# Altium PCB PCB1.PcbDoc
Units mil, origin at the board's own origin, x right, y up, seen from the top; angles counter-clockwise.
Board outline 1811.02 x 1811.02 mil, 2 copper layers (Top Layer, Bottom Layer); 89 components, 61 nets, 272 pads, 73 vias.
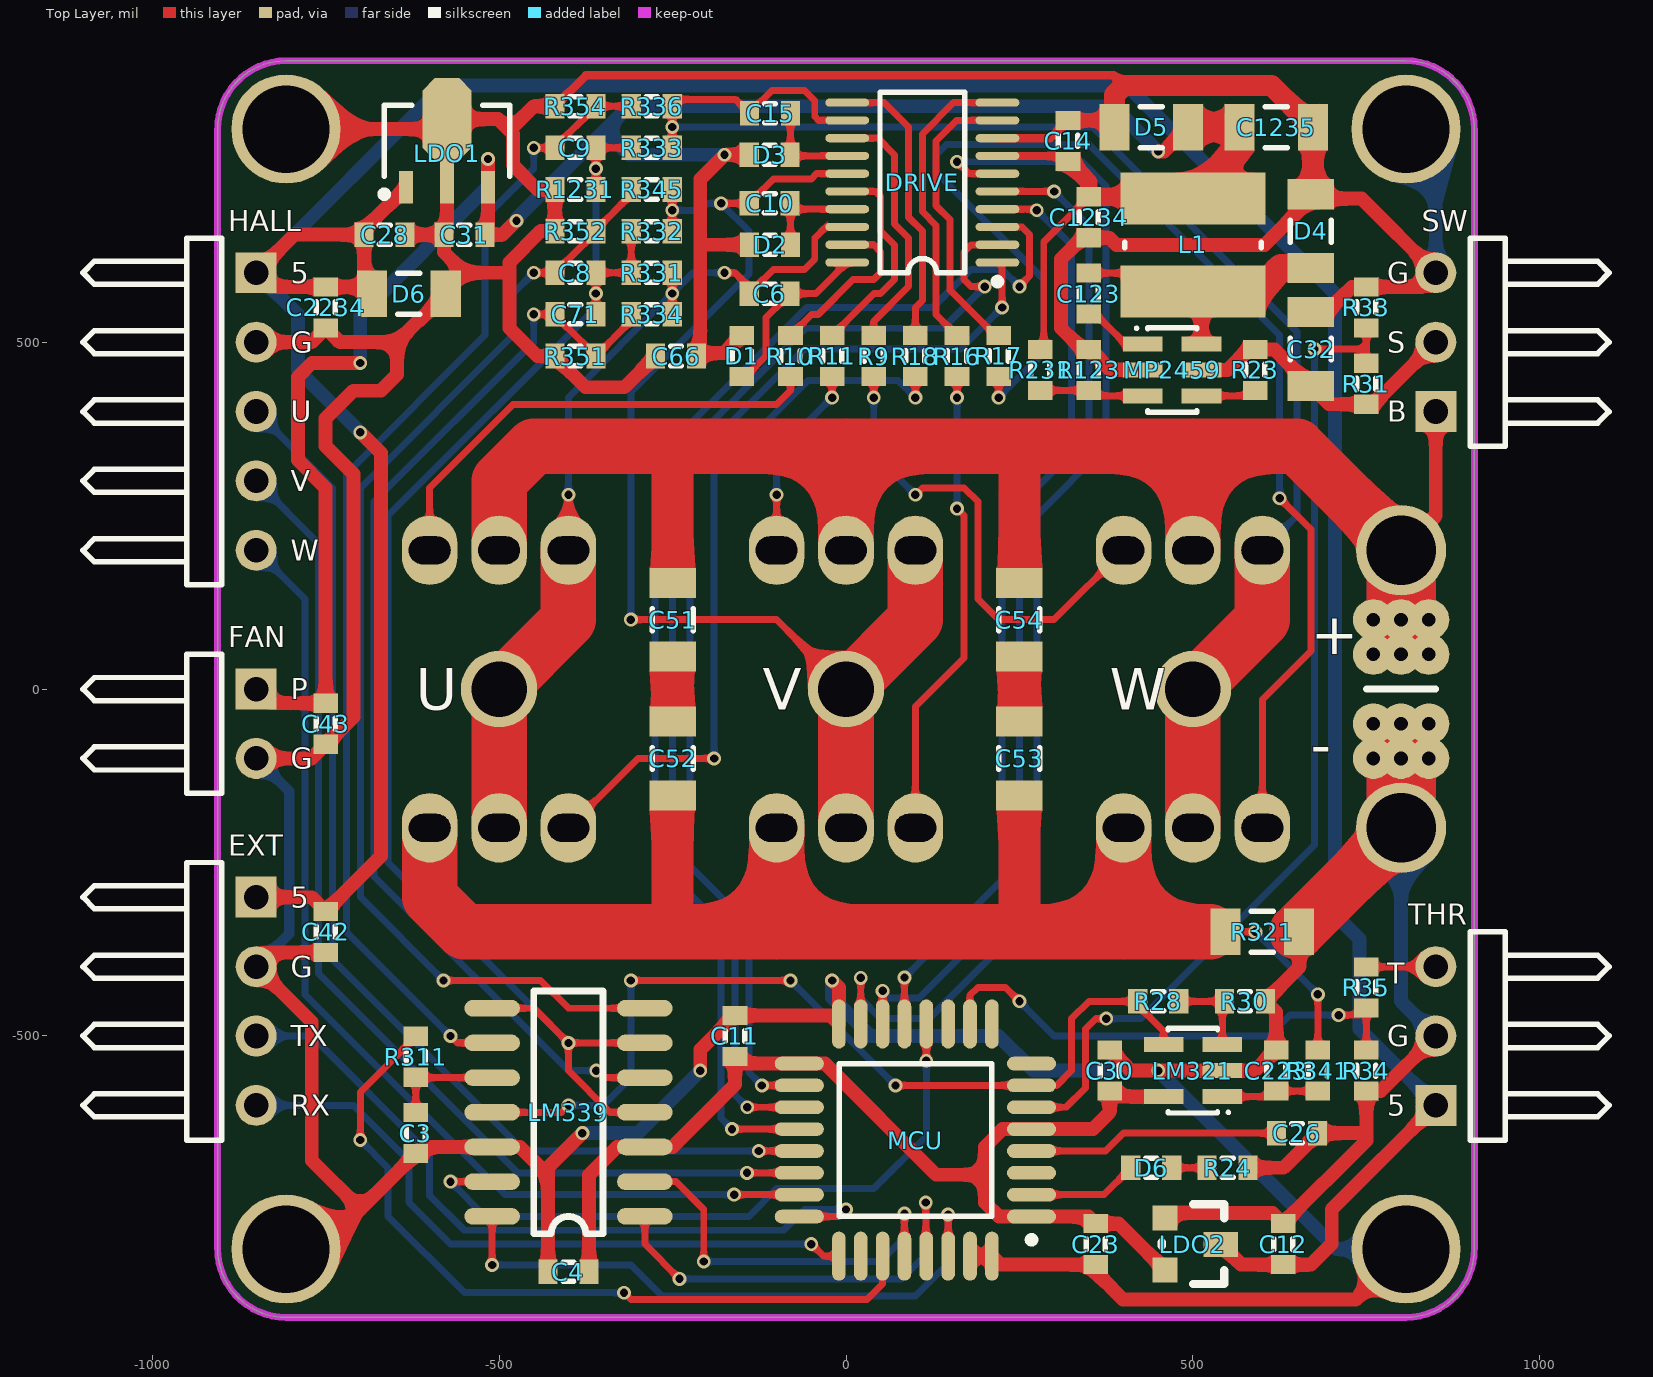
[diagram p0: Top Layer view]
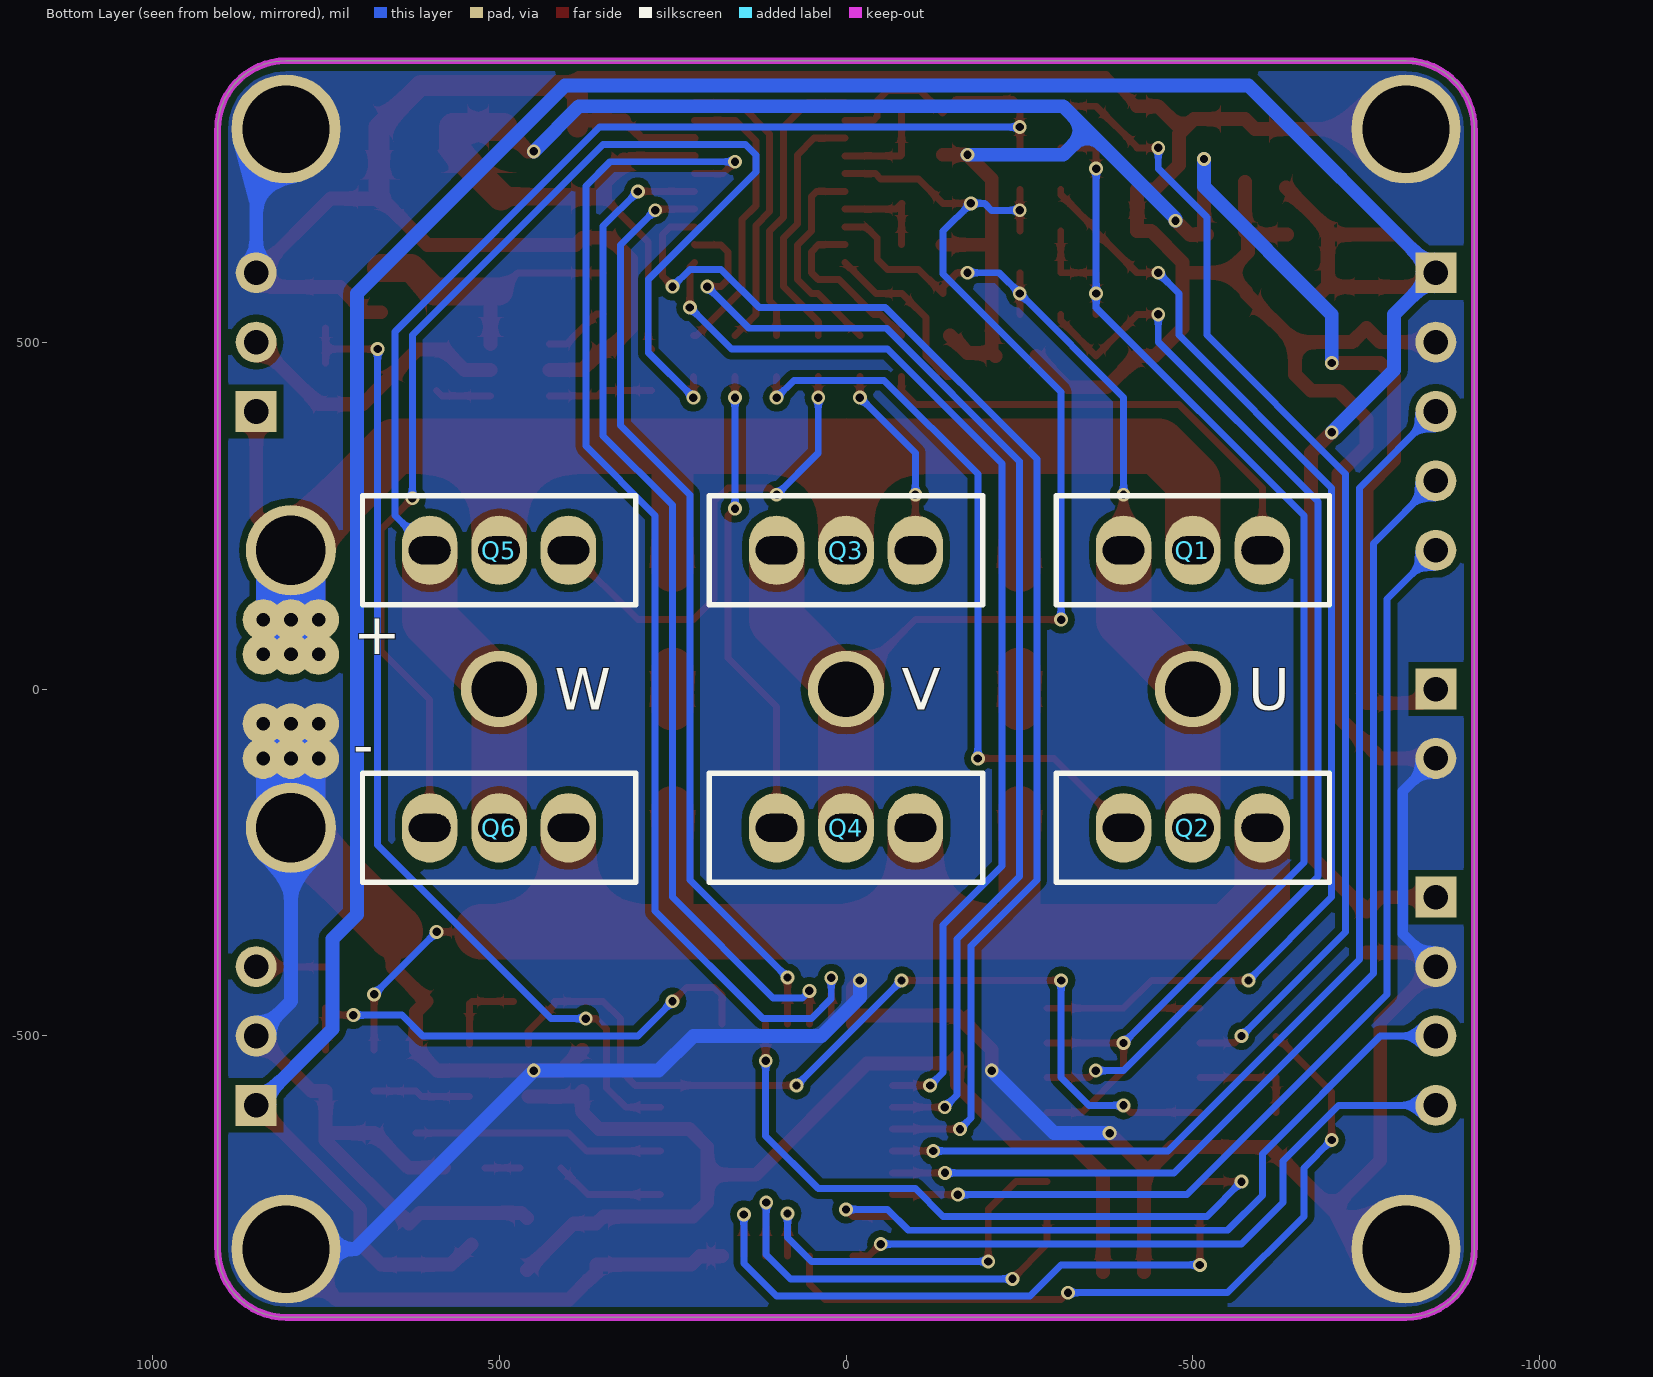
[diagram p1: Bottom Layer view, seen from below]

## Layer stack, top to bottom
Top Solder: solder mask 0.4, Solder Resist, Dk 3.5
Top Layer: signal copper 1.4
Dielectric 1: dielectric 12.6, FR-4, Dk 4.8
Bottom Layer: signal copper 1.4
Bottom Solder: solder mask 0.4, Solder Resist, Dk 3.5

## Board outline
-905.51,-807.09 ccw(c-807.09,-807.09) -807.09,-905.51 807.09,-905.51 ccw(c807.09,-807.09) 905.51,-807.09 905.51,807.09 ccw(c807.09,807.09) 807.09,905.51 -807.09,905.51 ccw(c-807.09,807.09) -905.51,807.09

## Design rules (kind name [scope] priority, off if disabled: settings)
Clearance [All] p1: gap=10 ignorepadtopadclearanceinfootprint=FALSE except(0: Arc-Hole Track-Hole SMDPad-Hole THPad-Hole Via-Hole Fill-Hole Poly-Hole Region-Hole Text-Hole)
PlaneConnect [All] p1: planeconnectstyle=Direct reliefexpansion=20 reliefentries=4 reliefconductorwidth=10 reliefairgap=10
PolygonConnect [All] p1: connectstyle=Direct reliefconductorwidth=10 reliefentries=4 polygonreliefangle="90 Angle" airgapwidth=10
RoutingVias [All] p1: holewidth=12 width=20 viastyle="Through Hole" minholewidth=12 minwidth=20 maxholewidth=393.7 maxwidth=393.7
SolderMaskExpansion [All] p1: expansion=4
Width [All] p1: maxlimit=100 minlimit=10 preferedwidth=10 minimp=50.000000 maximp=50.000000 favimp=50.000000
29 further rules are at their usual default settings.

## Components (designator, comment, footprint, x,y, rotation, side; value= is the part's Value field where it differs from the comment)
+ "TPS50mil" PHASE#1 800,200 r180 bottom (schematic designator V+)
- "TPS50mil" PHASE#1 800,-200 r180 bottom (schematic designator V-)
C3 "Cap" 0603 -620,-640 r270 top value=104
C4 "Cap" 0603 -400,-840 r0 top value=104
C6 "Cap" 0603 -110,570 r0 top value="1uF 25v"
C8 "Cap" 0603 -390,600 r0 top value=224
C9 "Cap" 0603 -390,780 r0 top value=224
C10 "Cap" 0603 -110,700 r0 top value="1uF 25v"
C11 "Cap" 0603 -160,-500 r90 top value=0.1uf
C12 "Cap" 0603 630,-800 r90 top value=0.1uf
C14 "Cap" 0603 320,790 r270 top value="10uf 16v"
C15 "Cap" 0603 -109.53,830 r0 top value="1uF 25v"
C23 "Cap" 0603 360,-800 r270 top value="10uf 10v"
C26 "Cap" 0603 650,-640 r180 top value=0.1uf
C28 "Cap" 0603 -665,655 r0 top value="10uf 10v"
C30 "Cap" 0603 380,-550 r90 top value=0.1uf
C31 "Cap" 0603 -550,655 r180 top value="1uf 25v"
C32 "Cap" 1206 670,490 r90 top value="4.7uf 100v"
C42 "Cap" 0603 -750,-350 r270 top value=104
C43 "Cap" 0603 -750,-50 r270 top value=104
C51 "Cap" 1206 -250,100 r270 top value=10uf
C52 "Cap" 1206 -250,-100 r270 top value=10uf
C53 "Cap" 1206 250,-100 r270 top value=10uf
C54 "Cap" 1206 250,100 r270 top value=10uf
C66 "Cap" 0603 -245,480 r180 top value=104
C71 "Cap" 0603 -390,540 r0 top value=224
C123 "Cap" 0603 350,570 r90 top value=100nf
C223 "Cap" 0603 620,-550 r90 top value=104
C1234 "Cap" 0603 350,680 r270 top value=104
C1235 "Cap" 1206 620,810 r0 top value="16V 22UF"
C2234 "Cap" 0603 -750,550 r270 top value=104
D1 "Diode" 0603 -150,480 r270 top
D2 "Diode" 0603 -109.53,640.43 r0 top
D3 "Diode" 0603 -110,770 r0 top
D4 "Diode" 1206 670,660 r270 top
D5 "D Zener" 1206 440,810 r0 top
D6 "D Zener" 1206 -630,570 r180 top
D6 "LED0" 0603 440,-690 r0 top
DRIVE "FD6288" TSSOP20 110,730 r90 top
EXT "Header 4H" HDR1X4H -850,-300 r270 top
FAN "Header 2H" HDR1X2H -850,0 r270 top
HALL "Header 5H" HDR1X5H -850,600 r270 top
L1 "Inductor" CDRH4D28 500,640 r90 top value=22uH
LDO1 "78L05" SOT-89 -575,790 r90 top
LDO2 "XC6206" SOT23 500,-800 r270 top
LM321 "LM321" SOT23-5 500,-550 r90 top
LM339 "LM339" SOP14 -290,-760 r180 top
MCU "STM32F030K6Tx" LQFP-32 100,-650 r180 top
MP2459 "MP2459" SOT23-6 470,460 r270 top
Q1 "MOSFET-N" TO220-MIX -500,200 r0 bottom
Q2 "MOSFET-N" TO220-MIX -500,-200 r180 bottom
Q3 "MOSFET-N" TO220-MIX 0,200 r0 bottom
Q4 "MOSFET-N" TO220-MIX 0,-200 r180 bottom
Q5 "MOSFET-N" TO220-MIX 500,200 r0 bottom
Q6 "MOSFET-N" TO220-MIX 500,-200 r180 bottom
R9 "Res1" 0603 40,480 r90 top value=8R2
R10 "Res1" 0603 -80,480 r90 top value=8R2
R11 "Res1" 0603 -20,480 r90 top value=8R2
R16 "Res1" 0603 160,480 r90 top value=8R2
R17 "Res1" 0603 220,480 r90 top value=8R2
R18 "Res1" 0603 100,480 r90 top value=8R2
R23 "Res1" 0603 590,460 r270 top value=100K
R24 "Res1" 0603 550,-690 r0 top value=100K
R28 "Res1" 0603 450,-450 r180 top value=2.4K
R30 "Res1" 0603 575,-450 r180 top value=100
R31 "Res1" 0603 750,440 r90 top value=75K
R33 "Res1" 0603 750,550 r90 top value=3K
R34 "Res1" 0603 750,-550 r270 top value=4.7K
R35 "Res1" 0603 750,-430 r270 top value=4.7K
R123 "Res1" 0603 350,460 r90 top value=4.7K
R231 "Res1" 0603 280,460 r90 top value=68K
R311 "Res1" 0603 -620,-530 r90 top value=1K
R321 "Res1" 1206 600,-350 r0 top value=0.01
R331 "Res1" 0603 -280,600 r180 top value=300K
R332 "Res1" 0603 -280,660 r180 top value=300K
R333 "Res1" 0603 -280,780 r180 top value=300K
R334 "Res1" 0603 -280,540 r180 top value=100K
R336 "Res1" 0603 -280,840 r180 top value=100K
R341 "Res1" 0603 680,-550 r270 top value=1K
R345 "Res1" 0603 -280,720 r180 top value=100K
R351 "Res1" 0603 -390,480 r0 top value=10K
R352 "Res1" 0603 -390,660 r0 top value=10K
R354 "Res1" 0603 -390,840 r0 top value=10K
R1231 "Res1" 0603 -390,720 r180 top value=10K
SW "Header 3H" HDR1X3H 850,400 r90 top
THR "Header 3H" HDR1X3H 850,-600 r90 top (schematic designator THROTTLE)
U "TPS50mil" PHASE#2 -500,0 r90 bottom
V "TPS50mil" PHASE#2 0,0 r90 bottom
W "TPS50mil" PHASE#2 500,0 r90 bottom

## Footprints (in the part's own frame and the unit in brackets; to place one, negate y for a bottom-side part, rotate by r counter-clockwise, add the part's x,y. Pads: shape width x height; smd on the part's side, far side on the other; paste and mask are expansions set on the pad)
0603 [mm] "Chip Resistor, Body 1.6x0.8mm, IPC High Density"
  rect 0.7x0.9 smd: 1(-0.75,0) 2(0.75,0)
  silkscreen extent -0.2,-0.35 0.2,0.35, body extent -0.85,-0.48 0.85,0.48, height 0.9
1206 [mm] "Chip Capacitor, Body 3.2x1.6mm, IPC High Density"
  rect 1.1x1.7 smd: 1(-1.35,0) 2(1.35,0)
  silkscreen extent -0.4,-0.75 0.4,0.75, body extent -1.7,-0.9 1.7,0.9, height 1.3
CDRH4D28 [mm] "Precision Wire Wound Inductor, 2-Leads, Body 5.00x5.00mm, IPC Medium Density"
  rect 1.9x5.3 smd: 1(-1.7,0) 2(1.7,0)
  silkscreen extent -0.1,-2.5 0.1,2.5, body extent -2.5,-2.5 2.5,2.5, height 3
HDR1X2H [mm] "Connector; Header; 2 Position; Right Angle"
  rect 1.5x1.5 hole 0.9: 1(0,0)
  round 1.5 hole 0.9: 2(2.54,0)
  silkscreen extent -1.27,-6.35 3.81,-1.27
HDR1X3H [mm] "Connector; Header; 3 Position; Right Angle"
  rect 1.5x1.5 hole 0.9: 1(0,0)
  round 1.5 hole 0.9: 2(2.54,0) 3(5.08,0)
  silkscreen extent -1.27,-6.35 6.35,-1.27
HDR1X4H [mm] "Connector; Header; 4 Position; Right Angle"
  rect 1.5x1.5 hole 0.9: 1(0,0)
  round 1.5 hole 0.9: 2(2.54,0) 3(5.08,0) 4(7.62,0)
  silkscreen extent -1.27,-6.35 8.89,-1.27
HDR1X5H [mm] "Connector; Header; 5 Position; Right Angle"
  rect 1.5x1.5 hole 0.9: 1(0,0)
  round 1.5 hole 0.9: 2(2.54,0) 3(5.08,0) 4(7.62,0) 5(10.16,0)
  silkscreen extent -1.27,-6.35 11.43,-1.27
LQFP-32 [mm] "LQFP"
  oval 1.8x0.5 smd: 1(-4.25,2.8) 2(-4.25,2) 3(-4.25,1.2) 4(-4.25,0.4) 5(-4.25,-0.4) 6(-4.25,-1.2) 7(-4.25,-2) 8(-4.25,-2.8) 17(4.25,-2.8) 18(4.25,-2) 19(4.25,-1.2) 20(4.25,-0.4) 21(4.25,0.4) 22(4.25,1.2) 23(4.25,2) 24(4.25,2.8)
  oval 0.5x1.8 smd: 9(-2.8,-4.25) 10(-2,-4.25) 11(-1.2,-4.25) 12(-0.4,-4.25) 13(0.4,-4.25) 14(1.2,-4.25) 15(2,-4.25) 16(2.8,-4.25) 25(2.8,4.25) 26(2,4.25) 27(1.2,4.25) 28(0.4,4.25) 29(-0.4,4.25) 30(-1.2,4.25) 31(-2,4.25) 32(-2.8,4.25)
  silkscreen extent -4.38,-2.79 2.79,3.77, body extent -3.5,-3.5 3.5,3.5, height 1.6
PHASE#1 [mil]
  round 130 hole 100: 1(0,0)
PHASE#2 [mil]
  round 110 hole 80: 1(0,0)
SOP14 [mil]
  oval 80x24 smd: 1(0,0) 2(0,-50) 3(0,-100) 4(0,-150) 5(0,-200) 6(0,-250) 7(0,-300) 8(220,-300) 9(220,-250) 10(220,-200) 11(220,-150) 12(220,-100) 13(220,-50) 14(220,0)
  silkscreen extent 60,-325 160,25
SOT23 [mil]
  rect 36x36 smd: 1(-37.5,-40) 3(37.5,-40)
  rect 36x50 smd: 2(0.5,40)
  silkscreen extent -58,-45 58,45
SOT23-5 [mm] "SOT-23/SC-74A; 5 Leads; Body 3.1 x 3 mm, inc. leads (LxW max)"
  rect 0.55x1.45 smd: 1(-0.95,-1.075) 2(0,-1.075) 3(0.95,-1.075) 4(0.95,1.075) 5(-0.95,1.075)
  silkscreen extent -1.57,-1.35 1.55,0.9
SOT23-6 [mm] "SOT-23/SC-74A; 5 Leads; Body 3.1 x 3 mm, inc. leads (LxW max)"
  rect 0.55x1.45 smd: 1(-0.95,-1.075) 2(0,-1.075) 3(0.95,-1.075) 4(0.95,1.075) 5(0,1.075) 6(-0.95,1.075)
  silkscreen extent -1.57,-1.35 1.55,0.9
SOT-89 [mm] "SOT89, 3-Leads, Body 4.5x2.4 mm, Pitch 1.5mm, Lead Span 4.1mm, IPC High Density"
  rect 1.2x0.5 smd: 1(-1.7,1.5) 3(-1.7,-1.5)
  rect 1.6x0.5 smd: 2(-1.5,0)
  oct 3x1.8 smd: 2(0.8,0)
  silkscreen extent -2.07,-2.3 1.3,2.42, body extent -1.3,-2.3 1.3,2.3, height 1.6
TO220-MIX [mil]
  oval 80x100 hole 40 slot 60 at 0 deg: 1(-100,0) 2(0,0) 3(100,0)
  silkscreen extent -197,-79 197,79
TSSOP20 [mm] "Shrink Small Outline; 20 Leads; Body Width 4.4 mm; Pitch 0.65 mm"
  oval 0.3x1.6 smd: 1(-2.925,-2.75) 2(-2.275,-2.75) 3(-1.625,-2.75) 4(-0.975,-2.75) 5(-0.325,-2.75) 6(0.325,-2.75) 7(0.975,-2.75) 8(1.625,-2.75) 9(2.275,-2.75) 10(2.925,-2.75) 11(2.925,2.75) 12(2.275,2.75) 13(1.625,2.75) 14(0.975,2.75) 15(0.325,2.75) 16(-0.325,2.75) 17(-0.975,2.75) 18(-1.625,2.75) 19(-2.275,2.75) 20(-2.925,2.75)
  silkscreen extent -3.75,-2.87 3.3,1.55, body extent -3.3,-1.91 3.3,1.91, height 1.1

## Part data
+ - U V W: "Test Point, 12x25mil, Not Populated"
C3 C4 C6 C8 C9 C10 C11 C12 C14 C15 C23 C26 C28 C30 C31 C32 C42 C43 C51 C52 C53 C54 C66 C71 C123 C223 C1234 C1235 C2234: "Capacitor", LatestRevisionDate=17-Jul-2002, LatestRevisionNote="Re-released for DXP Platform.", PackageDescription="Radial Cap, Thru-Hole; 2 Leads; 0.3 in Pin Spacing", PackageReference=RAD-0.3, Published=8-Jun-2000, Publisher="Altium Limited"
D1 D2 D3 D4: "Default Diode", Code_JEDEC=DO-214-AB, LatestRevisionDate=17-Jul-2002, LatestRevisionNote="Re-released for DXP Platform.", PackageDescription="DO-214-AB/SMC; 2 C-Bend Leads; Body 7.9 x 5.9 mm, inc. leads (LxW)", PackageReference=SMC, PackageVersion=Sep-1996, Published=8-Jun-2000, Publisher="Altium Limited"
D5 D6: "Zener Diode", LatestRevisionDate=17-Jul-2002, LatestRevisionNote="Re-released for DXP Platform.", PackageDescription="Diode, Thru-Hole; 2 Leads; 0.7 in Pin Spacing", PackageReference=DIODE-0.7, Published=8-Jun-2000, Publisher="Altium Limited"
D6: "Typical INFRARED GaAs LED", LatestRevisionDate=08-Jul-2005, LatestRevisionNote="Mech Layer 1 removed.", PackageDescription="LED; 2 Leads", PackageReference=LED-0, Published=8-Jun-2000, Publisher="Altium Limited"
EXT: "Header, 4-Pin, Right Angle", LatestRevisionDate=17-Jul-2002, LatestRevisionNote="Re-released for DXP Platform.", Publisher="Altium Limited"
FAN: "Header, 2-Pin, Right Angle", LatestRevisionDate=17-Jul-2002, LatestRevisionNote="Re-released for DXP Platform.", Publisher="Altium Limited"
HALL: "Header, 5-Pin, Right Angle", LatestRevisionDate=17-Jul-2002, LatestRevisionNote="Re-released for DXP Platform.", Publisher="Altium Limited"
LDO2: library part HT75xx
Q1 Q2 Q3 Q4 Q5 Q6: "N-Channel MOSFET", LatestRevisionDate=17-Jul-2002, LatestRevisionNote="Re-released for DXP Platform.", PackageDescription="TO, Flat Index; 3 In-Line, Axial Leads; Body Dia. 4.6mm; Lead Dia. 0.5 mm (max)", PackageReference=E3, PackageVersion=1995/1996, Published=8-Jun-2000, Publisher="Altium Limited"
R9 R10 R11 R16 R17 R18 R23 R24 R28 R30 R31 R33 R34 R35 R123 R231 R311 R321 R331 R332 R333 R334 R336 R341 R345 R351 R352 R354 R1231: "Resistor", LatestRevisionDate=17-Jul-2002, LatestRevisionNote="Re-released for DXP Platform.", PackageDescription="Axial Device, Thru-Hole; 2 Leads; 0.3 in Pin Spacing", PackageReference=AXIAL-0.3, Published=8-Jun-2000, Publisher="Altium Limited"
SW THR: "Header, 3-Pin, Right Angle", LatestRevisionDate=17-Jul-2002, LatestRevisionNote="Re-released for DXP Platform.", Publisher="Altium Limited"
L1: Code_IEC=1005, Code_JEITA=0402, LatestRevisionDate=29-May-2009, LatestRevisionNote="IPC-7351 Footprint Added.", PackageDescription="Chip Inductor", PackageReference=0402-A, Published=8-Jun-2000, Publisher="Altium Limited"

## Free pads (board coordinates)
  round 157.48 hole 125.98: 1(-807.09,807.09) 2(807.09,807.09) 3(-807.09,-807.09) 4(807.09,-807.09)
  round 59.06 hole 19.68: 1(760,-100) 1(760,-50) 1(760,50) 1(760,100) 1(800,-100) 1(800,-50) 1(800,50) 1(800,100) 1(840,-100) 1(840,-50) 1(840,50) 1(840,100)

## Via types
v1: diameter 20, hole 12, Top Layer to Bottom Layer, 73 vias

## Nets (pads, with @x,y where several pads share a name; then routed paths per layer and width w, separated by ;. In a path a pad name is that pad's centre, name@x,y a point inside that pad or via, vN(x,y) a via of type N, cw(c..) or ccw(c..) an arc to the next point about the centre after c; other vN are vias at no path point)
+3V3: C4.2 C11.1 C23.1 C30.1 LDO2.3 LM321.5 LM339.3 MCU.1 MCU.5 MCU.17 | length 1567.6
  Top Layer w20: C4.2 -370.47,-700.47 -330,-660 LM339.3 -250,-660 -160,-570 C11.1 -149.76,-539.76 MCU.17 -30.24,-539.76 130,-700 200,-700 ; LM321.5 387.87,-587.4 C30.1 380,-610 355.75,-634.25 MCU.5 225.75,-634.25 200,-660 200,-700 ; LDO2.3 392.97,-770.47 C23.1 349.76,-760.24 MCU.1 220.24,-760.24 200,-740 200,-700
+5: C12.1 C28.1 C42.1 C2234.1 D6.2@-683.15,570 EXT.1 HALL.1 LDO1.1 LDO2.2 THR.1 | length 5131.1
  Top Layer w20: EXT.1 -770.47,-300 C42.1 -670,-240.47 -670,340 v1(-700,370) ; D6.2@-683.15,570 D6.2@-692.68,579.53 ; LDO1.1 -694.53,662.6 C28.1 ; LDO2.2 569.03,-829.53 C12.1 670.47,-829.53 700,-800 700,-750 THR.1 ; C28.1 -795,655 HALL.1 -829.53,579.53 C2234.1 D6.2@-692.68,579.53 ; C28.1 -694.53,581.38 D6.2@-692.68,579.53
  Bottom Layer w20: v1(-700,370) -790,460 -790,540 HALL.1 -580,870 405,870 705,570 705,-325 740,-360 740,-490 THR.1
+12: C14.2 C31.1 C43.1 C66.1 C1234.1 C1235.1 D1.1 D2.1 D3.1 D5.2 DRIVE.7 FAN.1 L1.2 LDO1.3 R231.2 | length 3748.6
  Top Layer w10: R231.2 285,494.53 285,644.53 C1234.1
  Top Layer w12: DRIVE.7 312.09,768.39 C14.2
  Top Layer w20: FAN.1 -829.53,-20.47 C43.1 -750,290 -790,330 -790,450 -770,470 v1(-700,470) ; v1(-515.94,764.06) LDO1.3 -515.94,659.53 C31.1 -495,655 v1(-475,675) ; C66.1 C66.1@-211.22,484.25 ; D1.1 -175.28,484.25 C66.1@-211.22,484.25 ; D3.1 v1(-175,770) -210,735 -210,640 ; D2.1 -209.57,640.43 -210,640 ; v1(450,775) 458.15,775 D5.2 ; C66.1@-211.22,484.25 -210,485.47 -210,640
  Top Layer w25: C14.2 350,730.47 C1234.1 L1.2@497.4,709.53
  Top Layer w40: D5.2 C1235.1 566.85,778.98 L1.2@497.4,709.53
  Bottom Layer w20: v1(-700,470) -700,540 -515.94,724.06 v1(-515.94,764.06) ; v1(-475,675) -475,677.9 -347.9,805 ; v1(-175,770) -312.9,770 -347.9,805 ; v1(450,775) 385,840 -312.9,840 -347.9,805
+48: C32.1 MP2459.5 R23.1 R31.1 SW.2 | length 419.7
  Top Layer w20: MP2459.5 550,460 579.53,489.53 R23.1 617.32,489.53 C32.1 696.38,410.47 R31.1 760.47,410.47 SW.2
BAT_ADC: MCU.6 R31.2 R33.1 | length 1454.9
  Top Layer w10: MCU.6 317.24,-602.76 345,-575 345,-490 360,-475 v1(375,-475) ; v1(675,490) 750,490 ; R31.2 750,490 ; R33.1 750,490
  Bottom Layer w10: v1(375,-475) 425,-475 675,-225 v1(675,490)
CUR_ADC: LM321.4 LM339.11 MCU.7 R28.2 | length 1326
  Top Layer w10: LM339.11 -410,-610 v1(-400,-600) ; v1(-310,-420) v1(-80,-420) ; v1(71.26,-571.26) MCU.7 303.74,-571.26 325,-550 325,-475 350,-450 R28.2 420.47,-455.47 457.68,-492.68 LM321.4
  Bottom Layer w10: v1(-400,-600) -350,-600 -310,-560 v1(-310,-420) ; v1(-80,-420) v1(71.26,-571.26)
CUR_INT: LM339.13 MCU.12 | length 976
  Top Layer w10: v1(-570,-710) LM339.13 ; v1(115.75,-535.75) MCU.12
  Bottom Layer w10: v1(-570,-710) -520,-760 -140,-760 -100,-720 40,-720 115.75,-644.25 v1(115.75,-535.75)
CUR_PWM: MCU.27 R311.2 | length 1121
  Top Layer w10: v1(-700,-650) -700,-580.47 R311.2 ; v1(-320,-870) -310,-880 30,-880 52.76,-857.24 MCU.27
  Bottom Layer w10: v1(-700,-650) -660,-690 -660,-760 -550,-870 v1(-320,-870)
GND: -.1 C3.2 C4.1 C11.2 C12.2 C14.1 C23.2 C26.1 C28.2 C30.2 C31.2 C32.2 C42.2 C43.2 C66.2 C223.2 C1234.2 C1235.2 C2234.2 D4.1 D5.1 D6.1@-576.85,570 DRIVE.8 EXT.2 FAN.2 HALL.2 LDO1.2 LDO2.1 LM321.2 LM339.12 MCU.16 MCU.31 MCU.32 MP2459.2 pad.1@760,-50 pad.1@760,-100 pad.1@800,-50 pad.1@800,-100 pad.1@840,-50 pad.1@840,-100 pad.1@-807.09,807.09 pad.2 pad.3 pad.4 R24.2 R30.1 R33.2 R34.2 R123.2 R321.2 R351.1 R352.1 R354.1 R1231.2 SW.3 THR.2 | length 10754.5
  Top Layer w12: R354.1 -375.02,884.51 385.96,884.51 400.47,870 ; DRIVE.8 294.45,793.98 C14.1
  Top Layer w20: FAN.2 -770.47,-100 C43.2 -749.27,-79.53 -710,-40.25 -710,310 -750,350 -750,390 -710,430 -670,430 -646.85,453.15 -646.85,500 ; HALL.2 -770.47,500 C2234.2 -729.53,500 -646.85,500 ; pad.3 -757.56,-807.09 -700,-749.53 ; pad.1@-807.09,807.09 -589.41,807.09 -575,821.5 -501.5,821.5 -485,805 ; C42.2 -829.53,-379.53 EXT.2 -770,-480 -770,-679.53 -700,-749.53 ; C28.2 C31.2 ; LDO1.2@-575,730.94 -575,659.53 C31.2 ; C4.1 -429.53,-700.47 ; R354.1 -450,840 -485,805 ; v1(-380,-640) -429.53,-689.53 -429.53,-700.47 ; C66.2 -319.53,435 -375.25,435 -419.53,479.27 R351.1 -445,480 -485,520 -485,600 ; v1(-210,-550) -210,-519.75 -160.73,-470.47 C11.2 -22.44,-470.47 MCU.16 -10.24,-429.76 v1(-20,-420) ; MCU.31 MCU.32 222.44,-829.53 C23.2 360,-840.51 399.49,-880 734.17,-880 pad.4 ; C14.1 377.32,819.53 D5.1 ; C30.2 380.73,-520.47 410.25,-550 LM321.2 589.75,-550 619.27,-520.47 C223.2 620,-465.47 R30.1 653.15,-401.38 R321.2 ; MP2459.2 380.25,460 350.73,489.53 R123.2 340.47,489.53 310,520 310,620 340.47,650.47 C1234.2 379.53,650.47 390,640 603.09,640 670,706.91 743.09,706.91 SW.3 829.53,579.53 R33.2 729.53,579.53 693.15,543.15 C32.2 ; LDO2.1 467.5,-755 614.53,-755 C12.2 750,-650.47 750,-640 ; R24.2 630.25,-690 679.53,-640.73 C26.1 750,-640 ; THR.2 770.47,-579.53 R34.2 750,-640 ; -700,-749.53 C3.2 -610.47,-660 LM339.12 -470,-660 -429.53,-700.47 ; -646.85,500 -576.85,570 -576.85,573.15 -550,600 ; C31.2 -579.53,629.53 -550,600 ; -550,600 -485,600 ; -485,600 -485,615 -440,660 R352.1 R1231.2 -445,720 -480,755 -480,800 -485,805
  Top Layer w30: D5.1 386.85,856.38 400.47,870 613.15,870 C1235.2 673.15,710.06 D4.1@670,706.91
  Top Layer w80: R321.2@650,-350 -.1 -.1@800,-203.15
  Bottom Layer w15: EXT.2 -802.5,-352.5 -802.5,-147.5 FAN.2
  Bottom Layer w20: v1(-380,-640) -300,-640 v1(-210,-550) ; v1(-20,-420) -20,-444.64 35.36,-500 220,-500 270,-550 v1(450,-550) 707.09,-807.09 pad.4 ; -.1 800,-450 THR.2 ; pad.2 850,764.17 SW.3
HALL_U: HALL.3 MCU.21 | length 1622.5
  Top Layer w10: v1(-125.75,-665.75) MCU.21
  Bottom Layer w10: HALL.3 -740,290 -740,-390 -464.25,-665.75 v1(-125.75,-665.75)
HALL_V: HALL.4 MCU.22 | length 1558.9
  Top Layer w10: v1(-142.76,-697.24) MCU.22
  Bottom Layer w10: HALL.4 -760,210 -760,-410 -472.76,-697.24 v1(-142.76,-697.24)
HALL_W: HALL.5 MCU.23 | length 1501.3
  Top Layer w10: v1(-161.26,-728.74) MCU.23
  Bottom Layer w10: HALL.5 -780,130 -780,-440 -491.26,-728.74 v1(-161.26,-728.74)
HI_U: DRIVE.1 MCU.18 | length 1604
  Top Layer w10: v1(-121.26,-571.26) MCU.18 ; DRIVE.1 225,608.11 v1(225,550)
  Bottom Layer w10: v1(-121.26,-571.26) -140,-552.52 -140,-340 -225,-255 -225,325 -60,490 165,490 v1(225,550)
HI_V: DRIVE.2 MCU.19 | length 1731.6
  Top Layer w10: v1(-142.24,-602.76) MCU.19 ; v1(200,580) 180,580 170,590 170,630 180,640 217.83,640 DRIVE.2
  Bottom Layer w10: v1(-142.24,-602.76) -160,-585 -160,-360 -250,-270 -250,328.28 -58.28,520 140,520 v1(200,580)
HI_W: DRIVE.3 MCU.20 | length 1889.6
  Top Layer w10: v1(-164.25,-634.25) MCU.20 ; DRIVE.3 253.98,666.02 264.76,655.24 264.76,595.4 250,580.63 v1(250,580)
  Bottom Layer w10: v1(-164.25,-634.25) -180,-618.5 -180,-370 -275,-275 -275,331.57 -56.57,550 125,550 180,605 225,605 v1(250,580)
HO1: DRIVE.19 R10.2 | length 250.3
  Top Layer w10: R10.2 -80,510 -50,540 -40,540 10,590 40,590 50,600 50,630 39.57,640.43 DRIVE.19
HO2: DRIVE.16 R11.2 | length 302.9
  Top Layer w10: R11.2 40.47,570 50,570 70,590 70,640 50,660 50,710 42.8,717.2 DRIVE.16
HO3: DRIVE.13 R9.2 | length 367.7
  Top Layer w10: DRIVE.13 46.02,793.98 70,770 70,670 90,650 90,580 40,530 R9.2
I1+: C71.1 LM339.5 R334.2 R351.2 | length 1611.4
  Top Layer w10: v1(-450,540) C71.1 -419.53,539.06 R351.2 -309.53,530.94 R334.2 ; v1(-360,-550) -350,-560 LM339.5
  Bottom Layer w10: v1(-450,540) -450,500 -680,270 -680,-270 -400,-550 v1(-360,-550)
I2+: C8.1 LM339.7 R345.2 R352.2 | length 1675.9
  Top Layer w10: v1(-580,-420) -440,-420 -400,-460 LM339.7 ; v1(-450,600) C8.1 -360.47,659.06 R352.2 -360.47,661.76 -309.53,712.71 R345.2
  Bottom Layer w10: v1(-580,-420) -700,-300 -700,290 -480,510 -480,570 v1(-450,600)
I3+: C9.1 LM339.9 R336.2 R354.2 | length 1684
  Top Layer w10: v1(-570,-500) -560,-510 LM339.9 ; v1(-450,780) C9.1 -419.53,780.95 R354.2 R336.2
  Bottom Layer w10: v1(-570,-500) -720,-350 -720,310 -520,510 -520,680 -450,750 v1(-450,780)
I4-: C3.1 LM339.10 R311.1 | length 161.1
  Top Layer w10: C3.1 R311.1 -619.53,-560 LM339.10
LED0: D6.1@410.47,-690 MCU.2 | length 159.2
  Top Layer w10: MCU.2 371.73,-728.74 D6.1@410.47,-690
LI_U: DRIVE.4 MCU.13 | length 1350.5
  Top Layer w10: MCU.13 v1(84.25,-415.75) ; DRIVE.4 273.39,691.61 v1(275,690)
  Bottom Layer w10: v1(84.25,-415.75) 225,-275 225,280 325,380 325,640 v1(275,690)
LI_V: DRIVE.5 MCU.14 | length 1470.2
  Top Layer w10: MCU.14 v1(52.76,-435) ; DRIVE.5 v1(300,717.2)
  Bottom Layer w10: v1(52.76,-435) 62.76,-445 105,-445 250,-300 250,265 350,365 350,667.2 v1(300,717.2)
LI_W: DRIVE.6 MCU.15 | length 1807.6
  Top Layer w10: MCU.15 v1(21.26,-416.26) ; v1(160,760) 177.2,742.8 DRIVE.6
  Bottom Layer w10: v1(21.26,-416.26) 21.26,-446.26 50,-475 120,-475 275,-320 275,250 375,350 375,725 340,760 v1(160,760)
LO1: DRIVE.11 R18.2 | length 415.7
  Top Layer w10: DRIVE.11 54.84,845.16 90,810 90,680 110,660 110,560 100,550 R18.2
LO2: DRIVE.10 R16.2 | length 438.2
  Top Layer w10: R16.2 130,539.53 130,668.28 110,688.28 110,800 155.16,845.16 DRIVE.10
LO3: DRIVE.9 R17.2 | length 420.9
  Top Layer w10: DRIVE.9 159.57,819.57 130,790 130,696.57 150,676.57 150,575 215.47,509.53 R17.2
MOTOR_CUR_RAW: C52.2 C53.2 Q2.3 Q4.3 Q6.3 R321.1 R341.1 | length 2156.6
  Top Layer w10: R321.1 v1(590,-350) ; R341.1 v1(680,-440)
  Top Layer w60: -250,-350 C52.2@-250,-170 ; 250,-350 C53.2@250,-170
  Top Layer w80: Q2.3 -600,-300 -550,-350 -250,-350 -100,-350 ; Q4.3 -100,-350 ; Q6.3 400,-350 ; 525,-350 400,-350 ; -100,-350 250,-350 400,-350
  Bottom Layer w10: v1(590,-350) v1(680,-440)
NetC26_2: C26.2 MCU.4 | length 363.3
  Top Layer w10: MCU.4 374.25,-665.75 400,-640 C26.2@620,-640
NetC51_2: C51.2 C52.1 | length 60
  Top Layer w60: C52.1@-250,-30 C51.2@-250,30
NetC53_1: C53.1 C54.2 | length 60
  Top Layer w60: C53.1@250,-30 C54.2@250,30
NetC123_1: C123.1 MP2459.1 | length 95.5
  Top Layer w10: C123.1 359.53,540.47 402.6,497.4 MP2459.1
NetC123_2: C123.2 D4.2 L1.1 MP2459.6 | length 425.7
  Top Layer w10: C123.2 473.54,599.53 L1.1
  Top Layer w20: L1.1 512.32,560.75 MP2459.6
  Top Layer w40: L1.1 593.07,573.07 626.85,606.85 D4.2
NetC223_1: C223.1 LM321.1 R341.2 | length 140.9
  Top Layer w10: LM321.1 612.13,-587.4 C223.1 R341.2
NetD6_2: D6.2@469.53,-690 R24.1 | length 50.9
  Top Layer w10: D6.2@469.53,-690 R24.1
NetLM321_3: LM321.3 R28.1 R30.2 | length 123.5
  Top Layer w10: R28.1 539.17,-450 542.32,-453.15 LM321.3
NetMP2459_3: MP2459.3 R123.1 R231.1 | length 150.9
  Top Layer w10: R231.1 R123.1 357.87,422.6 MP2459.3
NetMP2459_4: MP2459.4 R23.2 | length 80.9
  Top Layer w10: MP2459.4 582.13,422.6 R23.2
NetQ1_2: Q1.1 R10.1 | length 688.5
  Top Layer w10: Q1.1 -600,290 -480,410 -100,410 -80,430 R10.1
NetQ2_2: Q2.1 R18.1 | length 1048.2
  Top Layer w10: Q2.1 -300,-100 v1(-190,-100) ; v1(100,420) R18.1
  Bottom Layer w10: v1(-190,-100) -190,310 -55,445 75,445 v1(100,420)
NetQ3_2: Q3.1 R11.1 | length 283.6
  Top Layer w10: Q3.1 v1(-100,280) ; v1(-20,420) R11.1
  Bottom Layer w10: v1(-100,280) -100,340 v1(-20,420)
NetQ4_2: Q4.1 R16.1 | length 683.6
  Top Layer w10: Q4.1 100,-25 170,45 170,250 v1(160,260) ; v1(160,420) R16.1
  Bottom Layer w10: v1(160,260) v1(160,420)
NetQ5_2: Q5.1 R9.1 | length 701.6
  Top Layer w10: v1(40,420) R9.1 ; v1(100,280) 110,290 170,290 190,270 190,130 220,100 300,100 Q5.1
  Bottom Layer w10: v1(40,420) 40,340 v1(100,280)
NetQ6_2: Q6.1 R17.1 | length 1844.4
  Top Layer w10: v1(220,420) R17.1 ; Q6.1 600,-15 670,55 670,230 v1(625,275)
  Bottom Layer w10: v1(220,420) 285,485 285,590 130,745 130,770 145,785 350,785 625,510 v1(625,275)
PHASE_U: C6.1 DRIVE.18 Q1.3 Q2.2 R331.1 R334.1 U.1 | length 1273.3
  Top Layer w10: Q1.3 v1(-400,280) ; R334.1 v1(-250.47,570) R331.1 ; v1(-175,600) -160,600 -139.53,579.53 C6.1 -104.53,605 -60,605 -45,620 -45,650 -28.98,666.02 DRIVE.18
  Top Layer w80: Q2.2 U.1 -400,100 Q1.3
  Bottom Layer w10: v1(-400,280) -400,420.47 v1(-250.47,570) -220.47,600 v1(-175,600)
PHASE_V: C10.1 DRIVE.15 Q3.3 Q4.2 R332.1 R345.1 V.1 | length 1813.9
  Top Layer w10: v1(-310,100) -100,100 V.1 ; R332.1 v1(-250.47,690) R345.1 ; v1(-180,700) C10.1 -104.53,735 -50,735 -42.2,742.8 DRIVE.15
  Top Layer w80: Q4.2 V.1 100,100 Q3.3
  Bottom Layer w10: v1(-310,100) -310,428.28 -140,598.28 -140,660 v1(-180,700) -200,700 -210,690 v1(-250.47,690)
PHASE_W: C15.1 DRIVE.12 Q5.3 Q6.2 R333.1 R336.1 W.1 | length 2169.2
  Top Layer w10: R333.1 v1(-250.47,810) R336.1 -240.47,850 -159.06,850 C15.1 -106.34,862.72 -60.01,862.72 -45,847.71 -45,825 -39.57,819.57 DRIVE.12
  Top Layer w80: Q6.2 W.1 600,100 Q5.3
  Bottom Layer w10: v1(-250.47,810) 355,810 650,515 650,250 Q5.3
SENS_U: LM339.2 MCU.28 | length 576.6
  Top Layer w10: LM339.2 -245,-710 -205,-750 v1(-205,-825) ; MCU.28 v1(84.25,-755.75)
  Bottom Layer w10: v1(-205,-825) 50,-825 84.25,-790.75 v1(84.25,-755.75)
SENS_V: LM339.1 MCU.29 | length 632.8
  Top Layer w10: LM339.1 -290,-800 v1(-240,-850) ; v1(115,-740) 115,-816.57 MCU.29
  Bottom Layer w10: v1(-240,-850) 80,-850 115,-815 v1(115,-740)
SENS_W: LM339.14 MCU.30 | length 896
  Top Layer w10: v1(-510,-830) LM339.14 ; MCU.30 v1(147.24,-757.24)
  Bottom Layer w10: v1(-510,-830) -310,-830 -265,-875 100,-875 147.24,-827.76 v1(147.24,-757.24)
THR_ADC: MCU.10 R34.1 R35.2 | length 724
  Top Layer w10: MCU.10 178.74,-441.26 190,-430 230,-430 v1(250,-450) ; v1(710,-470) 739.06,-470 749.53,-459.53 R35.2 R34.1
  Bottom Layer w10: v1(250,-450) 300,-500 610,-500 640,-470 v1(710,-470)
THR_RAW: R35.1 THR.3 | length 100.2
  Top Layer w10: R35.1 849.53,-400.47 THR.3
UART_RX: EXT.4 MCU.25 | length 964.9
  Top Layer w10: v1(-50,-800) -32.68,-817.32 MCU.25
  Bottom Layer w10: EXT.4 -710,-600 -630,-680 -630,-740 -570,-800 v1(-50,-800)
UART_TX: EXT.3 MCU.24 | length 1085.1
  Top Layer w10: MCU.24 -10.24,-760.24 v1(0,-750)
  Bottom Layer w10: EXT.3 -770,-500 -600,-670 -600,-730 -550,-780 -90,-780 -60,-750 v1(0,-750)
VB1: C6.2 D1.2 DRIVE.20 | length 252.3
  Top Layer w10: D1.2 -144.53,450.47 -115,480 -115,535.47 C6.2 -43.11,570 DRIVE.20
VB2: C10.2 D2.2 DRIVE.17 | length 144.8
  Top Layer w10: C10.2 C10.2@-80,699.53 ; D2.2 C10.2@-80,699.53 ; DRIVE.17 -72.09,691.61 C10.2@-80,699.53
VB3: C15.2 D3.2 DRIVE.14 | length 142.4
  Top Layer w10: C15.2 -80,770 -78.39,768.39 DRIVE.14
VBAT: +.1 C51.1 C54.1 pad.1@760,50 pad.1@760,100 pad.1@800,50 pad.1@800,100 pad.1@840,50 pad.1@840,100 Q1.2 Q3.2 Q5.2 SW.1 | length 2363.6
  Top Layer w20: +.1 850,250 SW.1
  Top Layer w60: C51.1@-250,170 -250,350 ; C54.1@250,170 250,350
  Top Layer w80: Q1.2 -500,300 -450,350 -250,350 0,350 ; Q3.2 0,350 ; Q5.2 500,350 ; +.1 650,350 500,350 ; 0,350 250,350 500,350
Vref: C8.2 C9.2 C71.2 LM339.4 LM339.6 LM339.8 R331.2 R332.2 R333.2 R1231.1 | length 2189.2
  Top Layer w10: LM339.8 -450,-460 v1(-400,-510) ; C71.2 v1(-360.47,570) C8.2 R331.2 R332.2 ; R1231.1 v1(-360.47,750) C9.2 R333.2 ; LM339.4 -340,-610 -400,-550 v1(-400,-510) ; LM339.6 v1(-400,-510)
  Bottom Layer w10: v1(-400,-510) -660,-250 -660,250 -360.47,549.53 v1(-360.47,570) v1(-360.47,750)
pads on no net: MCU.3 MCU.8 MCU.9 MCU.11 MCU.26

## Polygon pours and split planes (outlines as drawn)
GND on Bottom Layer "Top Layer-No Net" (solid, remove dead copper, pour order 8): -925,925 925,925 925,-925 -925,-925

## Keep-outs
Keep-Out Layer:
  the board outline again, w10

## Other copper
Top Layer:
  rectangle net VBAT: 750,50 850,200
  rectangle net GND: 750,-200 850,-50
Bottom Layer:
  rectangle net GND: 750,-210 850,-60
  rectangle net VBAT: 750,50 850,200

## Silkscreen, mask and mechanical layers (free items; w line width, h text height)
Top Overlay:
  lines w10: 750,0 850,0
  text "5" at -800,585 h30
  text "G" at 780,585 h30
  text "G" at -800,485 h30
  text "S" at 780,485 h30
  text "U" at -800,385 h30
  text "B" at 780,385 h30
  text "V" at -800,285 h30
  text "W" at -800,185 h30
  text "+" at 670,50 h60
  text "P" at -800,-15 h30
  text "U" at -620,-30 h60
  text "V" at -120,-30 h60
  text "W" at 380,-30 h60
  text "-" at 670,-110 h60
  text "G" at -800,-115 h30
  text "5" at -800,-315 h30
  text "G" at -800,-415 h30
  text "T" at 780,-425 h30
  text "TX" at -800,-515 h30
  text "G" at 780,-515 h30
  text "RX" at -800,-615 h30
  text "5" at 780,-615 h30
Top Solder:
  lines w60: -600,-200 -600,-300 -550,-350 525,-350 ; -500,-200 -500,0 -400,100 -400,200 ; -500,200 -500,300 -450,350 650,350 800,200 ; -100,-350 -100,-200 ; 0,-200 0,0 100,100 100,200 ; 0,200 0,350 ; 400,-350 400,-200 ; 500,-200 500,0 600,100 600,200 ; 500,200 500,350 ; 650,-350 800,-200
  lines w100: 800,-200 800,-100 ; 800,100 800,200
Bottom Solder:
  lines w100: 800,-200 800,-100 ; 800,100 800,200